# Allegro board SAME70-XPLD.brd
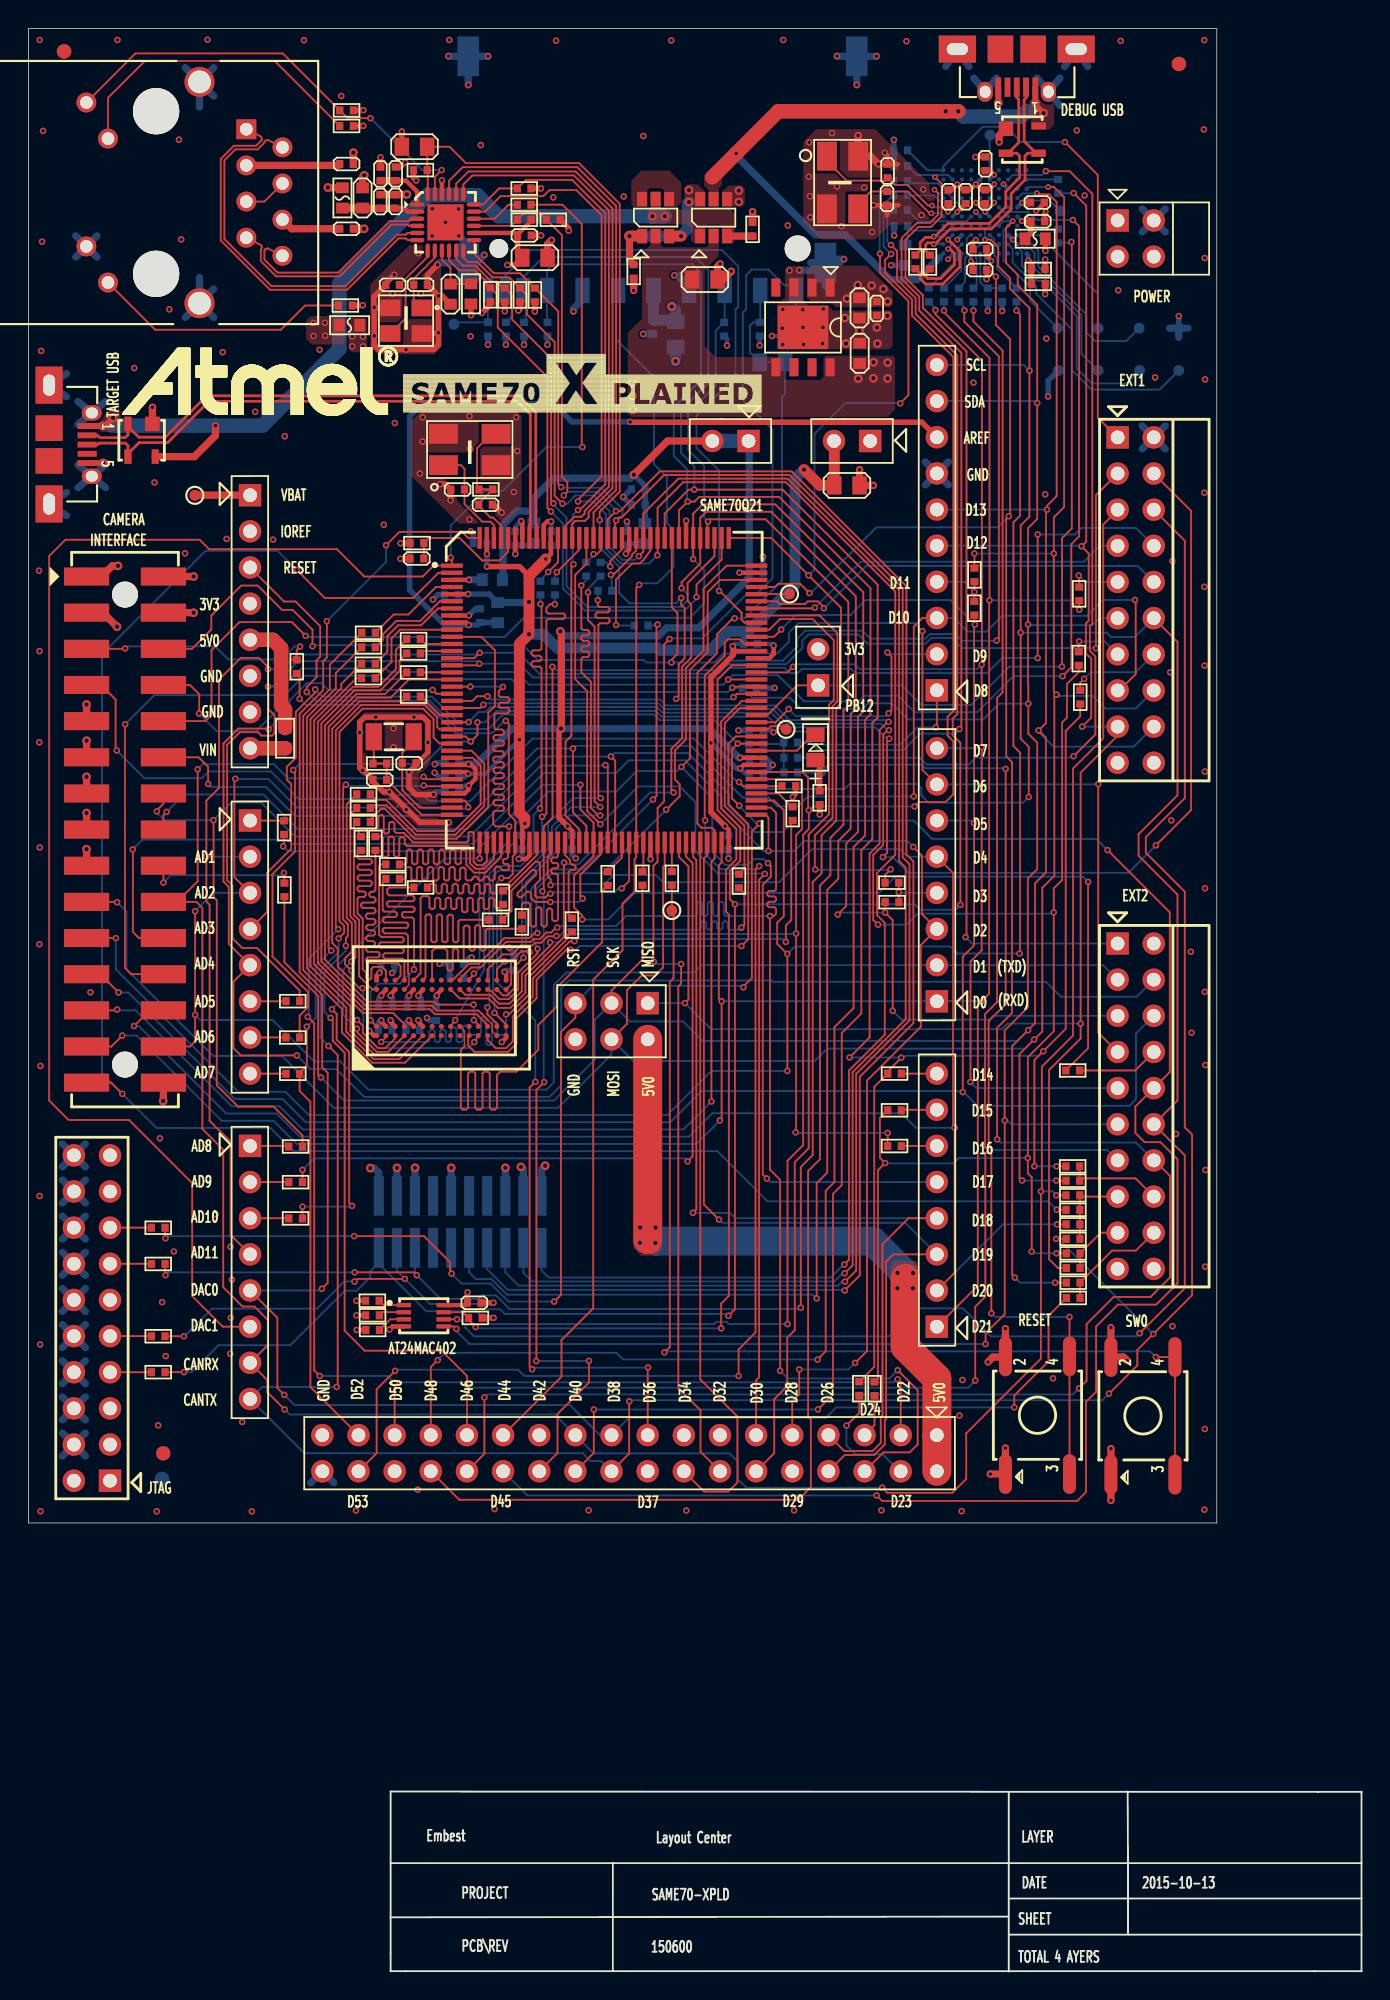
[diagram p0: board, top side]
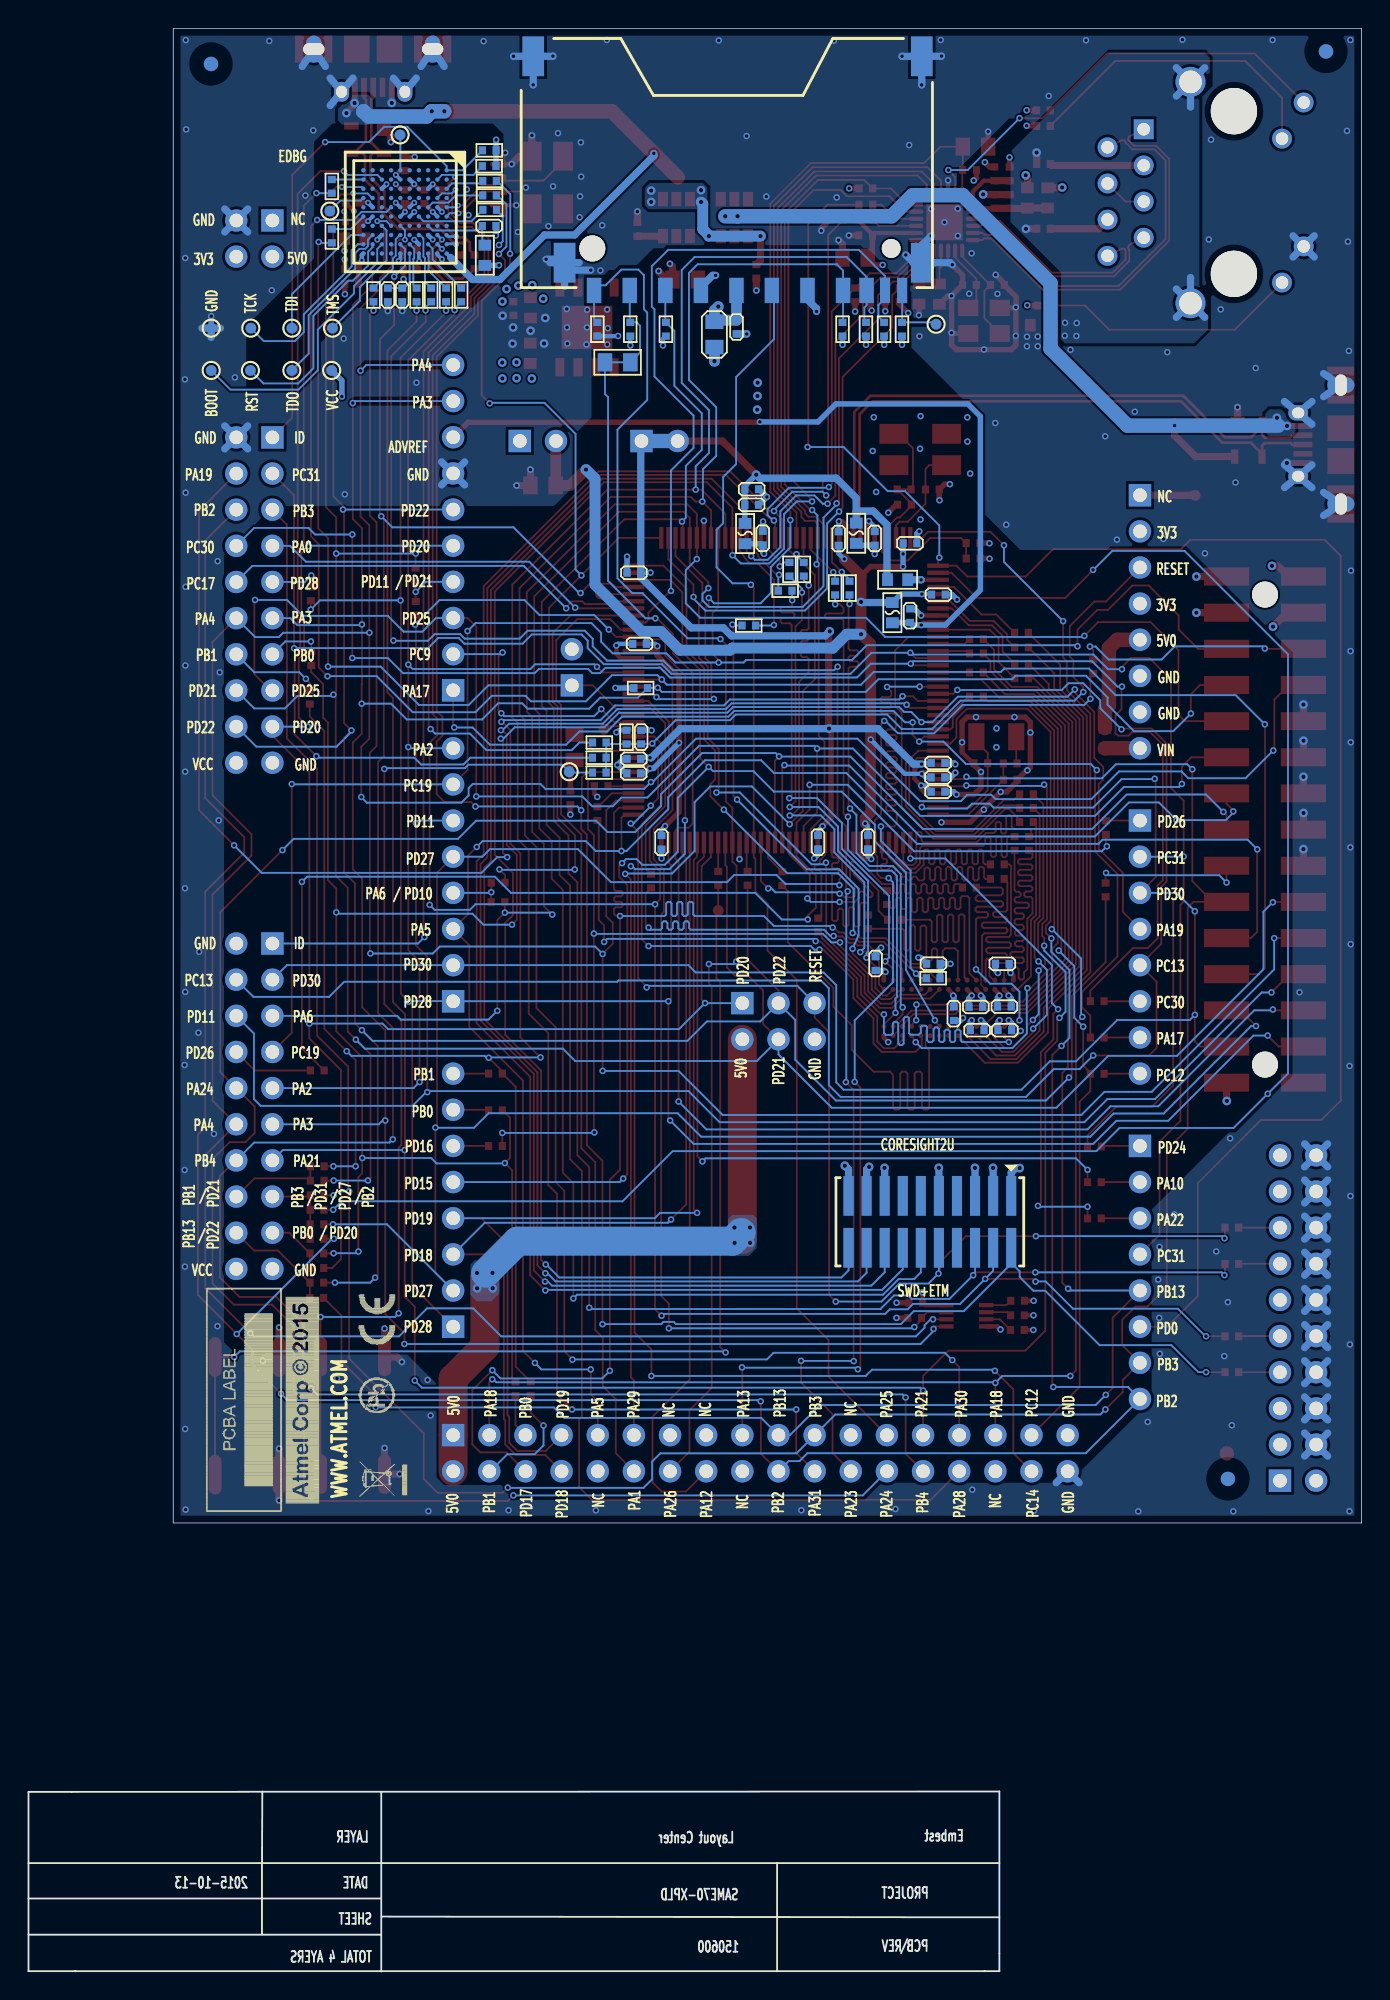
[diagram p1: board, bottom side, seen from below]

Outline 93.67 x 136.52 mm; copper layers: TOP, LYR2_GND, LYR3_VCC, BOTTOM. Coordinates in mm from the lower left corner of the outline.
Outline path: 25.45,7.62 93.67,7.62 ; 25.45,3.81 68.83,3.86 ; 26.51,0.03 25.45,0.03 25.45,1.27 25.45,12.65 90.62,12.62 93.67,12.62 93.67,0.03 90.34,0.03 ; 41.07,7.62 41.07,0.03 ; 68.88,12.62 68.88,0 ; 68.9,5.13 93.67,5.13 ; 68.9,2.59 93.67,2.59 ; 77.24,12.65 77.26,7.62 77.26,2.62 ; 90.39,0.03 26.49,0.03 ; 0,136.52 83.5,136.52 83.5,31.52 0,31.52 0,136.52

## Design rules (mm)
net group CLK: nets PA25 PD0
net group DIFFPAIR0: nets N24853098 N24853544
net group DIFFPAIR1: nets N24853102 N24853479
net group DIFFPAIR2: nets N24780370 N24789501
net group DIFFPAIR4: nets N24828258 N24828281
net group PA15: nets N25013420 PA15
net group PA16: nets N25013426 PA16
net group PA20: nets N25012935 PA20
net group PC0: nets N25013332 PC0
net group PC1: nets N25013338 PC1
net group PC2: nets N25013344 PC2
net group PC3: nets N25013354 PC3
net group PC4: nets N25013360 PC4
net group PC5: nets N25013366 PC5
net group PC6: nets N25013372 PC6
net group PC7: nets N25013378 PC7
net group PC20: nets N25012998 PC20
net group PC21: nets N25012992 PC21
net group PC22: nets N25012989 PC22
net group PC23: nets N25012980 PC23
net group PC24: nets N25012977 PC24
net group PC25: nets N25012968 PC25
net group PC26: nets N25012965 PC26
net group PC27: nets N25012956 PC27
net group PC28: nets N25012953 PC28
net group PC29: nets N25012944 PC29
net group PD13: nets N25012941 PD13
net group PD23: nets N2491361728 PD23
net group PE0: nets N25013384 PE0
net group PE1: nets N25013390 PE1
net group PE2: nets N25013396 PE2
net group PE3: nets N25013402 PE3
net group PE4: nets N25013408 PE4
net group PE5: nets N25013414 PE5
net group USB: nets N24828217 N24828220
net group CAM: nets N24807577 N24807666 PA3 PA4 PA5 PA6 PA9 PA24 PA27 PB3 PC19 PD11 PD12 PD21 PD24 PD25 PD27 PD28 PD30 PD31
net group RMII: nets PD6
net group SDCARD: nets N24863909 PA26 PA28 PA30 PA31 PC16

## Placement (name value [footprint] x y rotation side)
C92  100PF  [C0603]  29.66 117.85 270 top
C104  10nF  [C0402]  50.62 86.73 90 bottom
C200  100nF  [C0402]  36.74 100.68 90 bottom
C201  100nF  [C0402]  31.73 100.35 180 bottom
C202  100nF  [C0402]  29.73 96.74 180 bottom
C203  100nF  [C0402]  51.14 84.19 0 bottom
C204  100nF  [C0402]  50.73 93.28 0 bottom
C205  100nF  [C0402]  29.77 83.9 180 bottom
C206  100nF  [C0402]  34.68 79.35 270 bottom
C207  100nF  [C0402]  49.19 79.34 270 bottom
C208  100nF  [C0402]  42.85 104.15 180 bottom
C209  100nF  [C0402]  29.76 84.91 180 bottom
C210  100nF  [C0402]  29.76 82.89 180 bottom
C211  100nF  [C0402]  51.13 98.28 0 bottom
C212  100nF  [C0402]  51.14 85.2 0 bottom
C213  100nF  [C0402]  38.2 79.34 270 bottom
C214  100nF  [C0402]  42.07 100.71 90 bottom
C215  1uf  [C0402]  42.86 103.05 180 bottom
C216  10uF  [C0805]  57.51 104.41 0 top
C217  100nF  [C0402]  34.21 100.69 90 bottom
C218  100nF  [C0402]  31.72 95.26 270 bottom
C219  10pF  [C0402]  27.29 99.28 180 top
C220  10uF  [C0805]  35.59 120.41 0 top
C300  18pF  [C0402]  24.68 83.73 0 top
C301  18pF  [C0402]  26.75 84.89 180 top
C302  12pF  [C0402]  32.12 103.06 180 top
C303  12pF  [C0402]  30.16 104.12 180 top
C600  100nF  [C0402]  31.33 46.99 0 top
C601  100nF  [C0402]  59.61 116.85 270 top
C602  4.7uf  [C0603]  58.39 116.89 270 top
C603  2.2UF  [C0603]  58.41 113.7 90 top
C612  10uF  [C0805]  45.47 115.02 270 bottom
C613  100nF  [C0402]  43.92 115.54 270 bottom
C700  100nF  [C0402]  25.78 124.36 90 top
C701  4.7uf  [C0603]  23.48 124.61 90 top
C702  100nF  [C0402]  24.72 124.36 90 top
C704  24PF  [C0402]  27.55 118.51 0 top
C705  100nF  [C0402]  22.35 127 0 top
C706  100nF  [C0402]  22.35 122.45 0 top
C708  2.2uf  [C0402]  24.73 126.3 90 top
C709  24PF  [C0402]  25.59 118.5 180 top
C710  100nF  [C0402]  25.8 126.31 90 top
C711  100nF  [C0402]  34.85 121.98 0 top
C713  10uF  [C0805]  27.13 128.21 180 top
C714  10uF  [C0805]  47.53 118.88 0 top
C900  22pF  [C0402]  60.37 126.5 90 top
C901  22pF  [C0402]  60.33 124.58 270 top
C902  10pF  [C0402]  61.3 122.64 180 bottom
C904  100nF  [C0402]  70.92 122.97 0 top
C905  2.2uf  [C0402]  68.41 117.8 270 bottom
C906  1nF  [C0402]  67.41 117.8 270 bottom
C908  2.2uf  [C0402]  25.1 67.8 0 bottom
C909  2.2uf  [C0402]  66.84 119.55 0 top
C910  100nF  [C0402]  66.84 121.02 0 top
C911  100nF  [C0402]  67.23 127.01 90 top
C912  100nF  [C0402]  67.23 124.7 90 top
C913  100nF  [C0402]  64.64 124.7 90 top
C914  2.2uf  [C0402]  70.89 124.29 0 top
C915  2.2uf  [C0402]  65.85 124.7 90 top
C916  100nF  [C0402]  34.15 70.82 90 bottom
C917  100nF  [C0402]  30.08 70.81 0 bottom
C918  100nF  [C0402]  25.24 70.8 0 bottom
C919  100nF  [C0402]  28.65 67.3 270 bottom
C920  100nF  [C0402]  25.07 66.14 180 bottom
C921  100nF  [C0402]  27.1 67.77 0 bottom
C922  100nF  [C0402]  27.01 66.14 180 bottom
D301  Green  [LED0805]  55.3 86.01 90 top
D302  PRTR5V0U2X  [SOT143B]  7.95 107.59 180 top
D902  PRTR5V0U2X  [SOT143B]  69.83 128.71 270 top
J101  Hearder 2x2  [H2X2LMZ]  77.8 121.76 270 top
J200  HEADER2-100  [H2M]  55.49 91.63 90 top
J201  HEADER2-100  [H2M_SHORT]  49.33 107.53 180 top
J203  HEADER2-100  [H2M]  57.87 107.53 180 top
J300  PAD  [R0402_SHORT]  24.69 84.88 180 top
J301  PAD  [R0402_SHORT]  32.14 104.13 180 top
J302  MICRO USB AB 5  [USBMICRO5_6A_A]  1.45 107.28 270 top
J400  CONN_HDR_15X2  [HS2X15_2MZ]  6.78 80.23 270 top
J401  SKT_2x10  [H2X10LMZ]  77.8 96.36 270 top
J402  SKT_2x10  [H2X10LMZ]  77.8 60.8 270 top
J403  CONN_HDR_10X2_19  [HS2X10JZ]  30.33 52.67 0 bottom
J406  SKT_2x10  [H2X10MZ]  4.46 45.91 90 top
J500  CONN_HDR_10X1  [H10M]  63.83 101.45 90 top
J501  CONN_HDR_8X1  [H8M]  15.57 94.84 270 top
J502  CONN_HDR_8X1  [H8M]  15.57 71.98 270 top
J503  CONN_HDR_8X1  [H8M]  63.83 77.06 90 top
J504  CONN_HDR_8X1  [H8M]  15.57 49.12 270 top
J505  CONN_HDR_8X1  [H8M]  63.83 54.2 90 top
J506  CONN_HDR_3X2  [H2X3MZ]  40.97 66.77 180 top
J507  CONN_HDR_18X2  [H2X18MZ]  42.24 36.42 180 top
J600  SD Card SOCKET  [SD11_6B280X180]  44.55 118.11 0 bottom
J700  RJ45  [RJ45_RB1-125B_P12_4]  15.31 129.44 90 top
J900  MICRO USB AB 5  [USBMICRO5_6A_A]  69.45 135.07 180 top
J901  PAD  [R0805_SHORT]  52.27 113.06 0 bottom
L200  470ohm@100MHz  [F0603]  32.97 95.47 270 bottom
L201  470ohm@100MHz  [F0603]  43.32 101.03 270 bottom
L202  470ohm@100MHz  [F0603]  35.51 101.06 270 bottom
L700  470ohm@100MHz  [F0603]  22.06 124.61 90 top
L701  470ohm@100MHz  [F0603]  22.57 115.67 0 top
L901  470ohm@100MHz  [F0603]  70.74 121.75 0 top
NOREF  -  []  8.26 9.36 0 top
NOREF#2  -  []  49.83 53.51 0 top
NOREF#3  -  []  96.26 9.36 90 top
NOREF#4  v*  [unnamed#2]  80.83 134.02 0 top
NOREF#5  v*  [unnamed#2]  9.47 36.41 0 top
NOREF#6  v*  [unnamed#2]  2.5 134.91 0 top
NOREF#7  v*  [unnamed#2]  80.85 134.02 180 bottom
NOREF#8  v*  [unnamed#2]  9.39 34.61 180 bottom
NOREF#9  v*  [unnamed#2]  2.5 134.9 180 bottom
Q109  FDC6312P  [SOT23_6TR_A]  44.07 123.23 90 top
Q110  FDC6312P  [SOT23_6TR_A]  48.14 123.23 90 top
R55  1.5K  [R0402]  33.47 117.8 90 top
R56  1.5K  [R0402]  32.45 117.8 90 top
R67  10K  [R0402]  34.53 117.8 270 top
R69  10K  [R0402]  35.58 117.8 270 top
R70  10K  [R0402]  36.88 123.08 0 top
R71  10K  [R0402]  34.84 123.08 180 top
R106  100K  [R0402]  51.65 86.73 270 bottom
R107  330R  [R0402]  53.56 86.35 0 bottom
R110  39R  [R0402]  53.56 84.24 180 bottom
R111  22R  [R0402]  43.06 94.57 180 bottom
R112  22R  [R0402]  40.5 97.02 0 bottom
R113  22R  [R0402]  40.2 98.52 90 bottom
R114  22R  [R0402]  39.19 98.52 90 bottom
R115  22R  [R0402]  36.99 97.2 90 bottom
R116  22R  [R0402]  35.98 97.2 90 bottom
R117  22R  [R0402]  27.06 92.61 0 top
R118  22R  [R0402]  27.06 93.62 0 top
R119  22R  [R0402]  53.7 81.35 90 top
R120  22R  [R0402]  27.06 91.27 0 top
R121  22R  [R0402]  49.92 76.62 90 top
R122  0R  [R0402]  53.56 85.28 180 bottom
R123  22R  [R0402]  27.06 89.57 0 top
R124  22R  [R0402]  40.7 76.78 90 top
R125  22R  [R0402]  23.55 80.76 180 top
R126  22R  [R0402]  23.36 79.26 270 top
R127  22R  [R0402]  24.38 79.26 270 top
R128  22R  [R0402]  25.59 77.79 180 top
R129  22R  [R0402]  25.59 76.77 180 top
R130  22R  [R0402]  33.34 75.45 270 top
R131  22R  [R0402]  32.82 73.9 180 top
R132  22R  [R0402]  34.67 73.74 270 top
R133  22R  [R0402]  23.9 94.06 180 top
R134  22R  [R0402]  23.89 93.04 180 top
R135  22R  [R0402]  23.89 91.89 180 top
R136  22R  [R0402]  23.89 90.87 180 top
R137  22R  [R0402]  23.54 81.75 180 top
R138  22R  [R0402]  23.54 82.72 180 top
R139  22R  [R0402]  38.18 73.53 270 top
R140  22R  [R0402]  27.56 76.16 180 top
R201  0R  [R0402]  73.8 92.24 90 top
R202  0R  [R0402]  73.9 89.54 270 top
R203  0R  [R0402]  73.83 96.79 90 top
R204  0R  [R0402]  73.39 52.5 0 top
R205  0R  [R0402]  73.41 49.43 0 top
R206  39R  [R0402]  43.14 76.81 90 top
R207  0R  [R0402]  60.86 63.09 180 top
R208  0R  [R0402]  60.86 60.51 180 top
R209  0R  [R0402]  73.38 63.31 180 top
R210  0R  [R0402]  66.47 98.13 90 top
R211  0R  [R0402]  58.38 40.95 270 top
R212  0R  [R0402]  66.46 95.78 270 top
R213  0R  [R0402]  59.45 40.95 90 top
R214  0R  [R0402]  18.57 68.18 180 top
R215  0R  [R0402]  17.96 80.37 90 top
R216  0R  [R0402]  18.57 65.62 180 top
R217  0R  [R0402]  60.68 75.13 180 top
R218  0R  [R0402]  60.67 76.5 180 top
R219  0R  [R0402]  18.77 57.97 180 top
R220  0R  [R0402]  18.77 55.46 180 top
R221  0R  [R0402]  18.77 52.91 180 top
R222  0R  [R0402]  18.85 91.68 90 top
R223  0R  [R0402]  17.98 76 270 top
R224  0R  [R0402]  73.39 54.54 0 top
R225  0R  [R0402]  73.39 53.52 0 top
R226  0R  [R0402]  73.4 51.48 0 top
R227  0R  [R0402]  73.41 50.46 0 top
R228  0R  [R0402]  73.38 56.57 180 top
R229  0R  [R0402]  73.41 47.33 180 top
R230  0R  [R0402]  73.41 48.4 180 top
R231  4.7K  [R0402]  50.65 90.18 0 bottom
R232  4.7K  [R0402]  53.43 83.29 0 top
R233  5.62K  [R0402]  27.3 100.36 180 top
R234  0R  [R0402]  60.86 58 180 top
R235  0R  [R0402]  73.38 55.56 180 top
R236  0R  [R0402]  18.57 63.08 180 top
R238  39R  [R0402]  34.83 124.14 0 top
R300  39R  [R0402]  45.21 76.81 90 top
R303  330R  [R0402]  55.59 82.47 270 top
R400  0R  [R0402]  9.12 42.11 0 top
R401  0R  [R0402]  9.12 44.63 0 top
R402  0R  [R0402]  9.12 52.26 0 top
R403  0R  [R0402]  9.12 49.72 0 top
R600  10K  [R0402]  24.19 45.08 180 top
R601  10K  [R0402]  24.18 46.1 180 top
R602  10K  [R0402]  24.17 47.13 180 top
R603  10K  [R0402]  31.4 45.93 180 top
R604  10K  [R0402]  22.35 130.76 0 top
R606  10K  [R0402]  48.88 115.39 270 bottom
R607  100K  [R0402]  51.38 115.39 90 bottom
R608  100K  [R0402]  53.69 115.39 90 bottom
R609  100K  [R0402]  34.82 115.39 90 bottom
R610  100K  [R0402]  36.47 115.39 90 bottom
R611  10K  [R0402]  33.55 115.39 270 bottom
R612  10K  [R0402]  32.29 115.39 270 bottom
R613  100K  [R0402]  42.53 119.45 270 top
R614  100K  [R0402]  50.88 122.41 90 top
R615  47K  [R0402]  70.96 118.57 0 top
R616  47K  [R0402]  70.95 119.62 180 top
R617  100K  [R0402]  30.1 69.79 0 bottom
R623  0R  [R0603]  18.03 86.65 270 top
R624  0R  [R0603]  32.6 97.79 0 bottom
R701  470  [R0402]  22.35 129.67 180 top
R702  10K  [R0402]  27.54 126.57 0 top
R703  470  [R0402]  22.27 117.05 180 top
R704  6.49K  [R0603]  31.09 117.87 270 top
R900  330R  [R0402]  72.35 121.94 90 bottom
R902  1K  [R0402]  61.29 127.96 0 bottom
R903  1K  [R0402]  61.3 126.84 180 bottom
R904  330R  [R0402]  61.26 123.77 0 bottom
R905  330R  [R0402]  61.27 124.79 0 bottom
R906  1K  [R0402]  34.83 125.28 0 top
R910  330R  [R0402]  66.4 117.8 270 bottom
R911  330R  [R0402]  69.43 117.8 270 bottom
R912  330R  [R0402]  65.37 117.8 270 bottom
R913  330R  [R0402]  64.33 117.8 270 bottom
R914  330R  [R0402]  63.27 117.8 270 bottom
R915  330R  [R0402]  72.35 125.42 90 bottom
R916  39R  [R0402]  63.34 120.11 90 top
R917  39R  [R0402]  62.32 120.12 90 top
R918  6.81K  [R0603]  61.6 120.58 270 bottom
R921  330R  [R0402]  61.27 125.81 0 bottom
SW100  TP-1138  [SWS4B60S_A]  70.9 39.09 90 top
SW300  TP-1138  [SWS4B60S_A]  78.31 39.04 90 top
TP100  TPAD_030  [TP30]  55.68 84.3 180 bottom
TP200  TPAD_030  [TP30]  53.23 87.28 0 top
TP201  TPAD_030  [TP30]  53.48 96.78 0 top
TP300  TPAD_030  [TP30]  45.2 74.55 0 top
TP600  TPAD_030  [TP30]  29.9 115.74 180 bottom
TP900  TPAD_030  [TP30]  80.83 115.46 180 bottom
TP901  TPAD_030  [TP30]  80.83 112.49 180 bottom
TP902  TPAD_030  [TP30]  78.05 115.46 180 bottom
TP903  TPAD_030  [TP30]  75.16 115.46 180 bottom
TP904  TPAD_030  [TP30]  75.16 112.49 180 bottom
TP905  TPAD_030  [TP30]  72.31 115.46 180 bottom
TP906  TPAD_030  [TP30]  78.07 112.49 180 bottom
TP907  TPAD_030  [TP30]  72.36 112.49 180 bottom
TP908  TPAD_030  [TP30]  72.49 123.69 180 bottom
TP909  TPAD_030  [TP30]  67.56 129.04 180 bottom
TP910  TPAD_030  [TP30]  11.69 103.72 0 top
U200  SAME70Q21  [LQPF144P5]  40.46 90.02 0 top
U600  AT24MAC402-MAHM-T  [UDFN8CR]  27.78 46.08 0 top
U601  BD33IC0WEFJ-E2  [SOP8_1JA]  54.42 115.51 180 top
U700  KSZ8081RNACA  [QFN24_1P5M]  29.3 122.9 0 top
U900  AT32UC3A4256J-C1UR  [BGA100F]  67.21 123.63 270 bottom
U901  IS42S16100F-5BL  [BGA60F]  29.01 67.7 90 top
XC300  32.768 kHz  [X2S32X15]  25.66 86.75 180 top
XC301  12MHz  [X4S50X32]  31.01 106.94 0 top
XC700  25MHZ  [X4S32X25]  26.53 115.99 180 top
XC900  12MHz  [X4S50X32]  57.21 125.69 270 top

## Library data of the parts
C92 = CAP_NP: signal model: DEFAULT_CAPACITOR_100.000000pF_2_1
C104 = C_Generic
C200-C214 C216-C218 C220 C600 C601 C612 C613 C700 C702 C705 C706 C710 C711 C713 C714 C904 C910-C913 C916-C922 = C_Generic: tolerance: 10%
C215 C602 C701 C708 C905 C908 C909 C914 C915 = CAP-100nF-0603-25V-X7R: tolerance: 10% X5R
C219 C902 = C_Generic: tolerance: CAP  10UF 10V 10%  SMD0805
C300-C303 C900 C901 = CAP-18pF-0603-50V-COG: tolerance: COG
C603 = CAP_NP: signal model: DEFAULT_CAPACITOR_1e+06pF_2_1
C704 C709 = CAP_NP: signal model: DEFAULT_CAPACITOR_24.000000pF_2_1
C906 = C_Generic: tolerance: 5%
D301 = LED_Small
D302 D902 = PRTR5V0U2X_0
J101 = HDR 7x2_3.100"
J200 J201 J203 = TSW 2PTS-DROIT_1
J300 J301 J901 = PAD
J302 J900 = USB_MINI_AB_RECEPTACLE
J400 = CONN_HDR_15X2
J401 J402 J406 = CONN_HDR_10X2
J403 = CONN_HDR_10X2_19
J500 = CONN_HDR_10X1
J501-J505 = CONN_HDR_8X1
J506 = CONN_HDR_3X2
J507 = CONN_HDR_18X2
J600 = SD Card SOCKET
J700 = CONN_RJ45_8P_SH
L200-L202 L700 L701 L901 = FBEAD_1
Q109 Q110 = FDC6312P
R55 R56 = RES: signal model: DEFAULT_RESISTOR_1500OHM_2_1; room: RMII_PHY
R67 R69-R71 R600-R604 R606 R611 R612 R615 R616 R702 = RES: signal model: DEFAULT_RESISTOR_10000OHM_2_1; room: RMII_PHY
R106 R107 R110 R206 R238 R300 R303 R607-R610 R613 R614 R617 R900 R904 R905 R910-R917 R921 = R_Generic: tolerance: 1%
R111-R121 R123-R140 = R_Generic: tolerance: 1%; signal model: R_GENERIC_R0402_22R_1%_22R
R122 R201-R205 R207-R230 R234-R236 R400-R403 R623 R624 = R_Generic: tolerance: 5%
R231 R232 = RES: signal model: DEFAULT_RESISTOR_10000OHM_2_1
R233 R902 R903 R906 R918 = R_Generic
R701 R703 = RES
R704 = RES: signal model: DEFAULT_RESISTOR_6490OHM_2_1
SW100 SW300 = B3S_2
TP100 TP200 TP201 TP300 TP600 TP900-TP910 = TestLoop
U200 = SAMV71Q21_2
U600 = AT24MAC402-MAHM-T
U601 = BD33IC0WEFJ-E2_0
U700 = KSZ8081RNACA_QFN_24P
U900 = AT32UC3A4256J
U901 = IS42S16100E
XC300 = CM415_0.768kHz: tolerance: 20ppm _-10C.+60C
XC301 XC900 = 12MHz_0
XC700 = CRYSTAL13

## Footprints (pads in the part's own frame, mm; a bottom-side part is the same pattern mirrored in y, then rotated)
BGA60F
  round 0.356 smd: A1(-1.95,4.55) A2(-1.3,4.55) A6(1.3,4.55) A7(1.95,4.55) B1(-1.95,3.9) B2(-1.3,3.9) B6(1.3,3.9) B7(1.95,3.9) C1(-1.95,3.25) C2(-1.3,3.25) C6(1.3,3.25) C7(1.95,3.25) D1(-1.95,2.6) D2(-1.3,2.6) D6(1.3,2.6) D7(1.95,2.6) E1(-1.95,1.95) E2(-1.3,1.95) E6(1.3,1.95) E7(1.95,1.95) F1(-1.95,1.3) F2(-1.3,1.3) F6(1.3,1.3) F7(1.95,1.3) G1(-1.95,0.65) G2(-1.3,0.65) G6(1.3,0.65) G7(1.95,0.65) H1(-1.95,0) H2(-1.3,0) H6(1.3,0) H7(1.95,0) J1(-1.95,-0.65) J2(-1.3,-0.65) J6(1.3,-0.65) J7(1.95,-0.65) K1(-1.95,-1.3) K2(-1.3,-1.3) K6(1.3,-1.3) K7(1.95,-1.3) L1(-1.95,-1.95) L2(-1.3,-1.95) L6(1.3,-1.95) L7(1.95,-1.95) M1(-1.95,-2.6) M2(-1.3,-2.6) M6(1.3,-2.6) M7(1.95,-2.6) N1(-1.95,-3.25) N2(-1.3,-3.25) N6(1.3,-3.25) N7(1.95,-3.25) P1(-1.95,-3.9) P2(-1.3,-3.9) P6(1.3,-3.9) P7(1.95,-3.9) R1(-1.95,-4.55) R2(-1.3,-4.55) R6(1.3,-4.55) R7(1.95,-4.55)
BGA100F
  round 0.305 smd: A1(-2.925,2.925) A2(-2.275,2.925) A3(-1.625,2.925) A4(-0.975,2.925) A5(-0.325,2.925) A6(0.325,2.925) A7(0.975,2.925) A8(1.625,2.925) A9(2.275,2.925) A10(2.925,2.925) B1(-2.925,2.275) B2(-2.275,2.275) B3(-1.625,2.275) B4(-0.975,2.275) B5(-0.325,2.275) B6(0.325,2.275) B7(0.975,2.275) B8(1.625,2.275) B9(2.275,2.275) B10(2.925,2.275) C1(-2.925,1.625) C2(-2.275,1.625) C3(-1.625,1.625) C4(-0.975,1.625) C5(-0.325,1.625) C6(0.325,1.625) C7(0.975,1.625) C8(1.625,1.625) C9(2.275,1.625) C10(2.925,1.625) D1(-2.925,0.975) D2(-2.275,0.975) D3(-1.625,0.975) D4(-0.975,0.975) D5(-0.325,0.975) D6(0.325,0.975) D7(0.975,0.975) D8(1.625,0.975) D9(2.275,0.975) D10(2.925,0.975) E1(-2.925,0.325) E2(-2.275,0.325) E3(-1.625,0.325) E4(-0.975,0.325) E5(-0.325,0.325) E6(0.325,0.325) E7(0.975,0.325) E8(1.625,0.325) E9(2.275,0.325) E10(2.925,0.325) F1(-2.925,-0.325) F2(-2.275,-0.325) F3(-1.625,-0.325) F4(-0.975,-0.325) F5(-0.325,-0.325) F6(0.325,-0.325) F7(0.975,-0.325) F8(1.625,-0.325) F9(2.275,-0.325) F10(2.925,-0.325) G1(-2.925,-0.975) G2(-2.275,-0.975) G3(-1.625,-0.975) G4(-0.975,-0.975) G5(-0.325,-0.975) G6(0.325,-0.975) G7(0.975,-0.975) G8(1.625,-0.975) G9(2.275,-0.975) G10(2.925,-0.975) H1(-2.925,-1.625) H2(-2.275,-1.625) H3(-1.625,-1.625) H4(-0.975,-1.625) H5(-0.325,-1.625) H6(0.325,-1.625) H7(0.975,-1.625) H8(1.625,-1.625) H9(2.275,-1.625) H10(2.925,-1.625) J1(-2.925,-2.275) J2(-2.275,-2.275) J3(-1.625,-2.275) J4(-0.975,-2.275) J5(-0.325,-2.275) J6(0.325,-2.275) J7(0.975,-2.275) J8(1.625,-2.275) J9(2.275,-2.275) J10(2.925,-2.275) K1(-2.925,-2.925) K2(-2.275,-2.925) K3(-1.625,-2.925) K4(-0.975,-2.925) K5(-0.325,-2.925) K6(0.325,-2.925) K7(0.975,-2.925) K8(1.625,-2.925) K9(2.275,-2.925) K10(2.925,-2.925)
C0402
  rect 0.508x0.559 smd: 1(-0.483,0) 2(0.483,0)
C0603
  rect 0.762x0.889 smd: 1(-0.711,0) 2(0.711,0)
C0805
  rect 1.016x1.27 smd: 1(-0.889,0) 2(0.889,0)
F0603
  rect 0.762x0.889 smd: 1(-0.711,0) 2(0.711,0)
H2M
  rect 1.575x1.575 hole 0.965: 1(-1.27,0)
  round 1.575 hole 0.965: 2(1.27,0)
H2M_SHORT
  rect 1.575x1.575 hole 0.965: 1(-1.27,0)
  round 1.575 hole 0.965: 2(1.27,0)
H2X2LMZ
  rect 1.575x1.575 hole 0.965: 1(-1.27,-1.27)
  round 1.575 hole 0.965: 2(-1.27,1.27) 3(1.27,-1.27) 4(1.27,1.27)
H2X3MZ
  rect 1.575x1.575 hole 0.965: 1(-2.54,-1.27)
  round 1.575 hole 0.965: 2(-2.54,1.27) 3(0,-1.27) 4(0,1.27) 5(2.54,-1.27) 6(2.54,1.27)
H2X10LMZ
  rect 1.575x1.575 hole 0.965: 1(-11.43,-1.27)
  round 1.575 hole 0.965: 2(-11.43,1.27) 3(-8.89,-1.27) 4(-8.89,1.27) 5(-6.35,-1.27) 6(-6.35,1.27) 7(-3.81,-1.27) 8(-3.81,1.27) 9(-1.27,-1.27) 10(-1.27,1.27) 11(1.27,-1.27) 12(1.27,1.27) 13(3.81,-1.27) 14(3.81,1.27) 15(6.35,-1.27) 16(6.35,1.27) 17(8.89,-1.27) 18(8.89,1.27) 19(11.43,-1.27) 20(11.43,1.27)
H2X10MZ
  rect 1.575x1.575 hole 0.965: 1(-11.43,-1.27)
  round 1.575 hole 0.965: 2(-11.43,1.27) 3(-8.89,-1.27) 4(-8.89,1.27) 5(-6.35,-1.27) 6(-6.35,1.27) 7(-3.81,-1.27) 8(-3.81,1.27) 9(-1.27,-1.27) 10(-1.27,1.27) 11(1.27,-1.27) 12(1.27,1.27) 13(3.81,-1.27) 14(3.81,1.27) 15(6.35,-1.27) 16(6.35,1.27) 17(8.89,-1.27) 18(8.89,1.27) 19(11.43,-1.27) 20(11.43,1.27)
H2X18MZ
  rect 1.575x1.575 hole 0.965: 1(-21.59,-1.27)
  round 1.575 hole 0.965: 2(-21.59,1.27) 3(-19.05,-1.27) 4(-19.05,1.27) 5(-16.51,-1.27) 6(-16.51,1.27) 7(-13.97,-1.27) 8(-13.97,1.27) 9(-11.43,-1.27) 10(-11.43,1.27) 11(-8.89,-1.27) 12(-8.89,1.27) 13(-6.35,-1.27) 14(-6.35,1.27) 15(-3.81,-1.27) 16(-3.81,1.27) 17(-1.27,-1.27) 18(-1.27,1.27) 19(1.27,-1.27) 20(1.27,1.27) 21(3.81,-1.27) 22(3.81,1.27) 23(6.35,-1.27) 24(6.35,1.27) 25(8.89,-1.27) 26(8.89,1.27) 27(11.43,-1.27) 28(11.43,1.27) 29(13.97,-1.27) 30(13.97,1.27) 31(16.51,-1.27) 32(16.51,1.27) 33(19.05,-1.27) 34(19.05,1.27) 35(21.59,-1.27) 36(21.59,1.27)
H8M
  rect 1.575x1.575 hole 0.965: 1(-8.89,0)
  round 1.575 hole 0.965: 2(-6.35,0) 3(-3.81,0) 4(-1.27,0) 5(1.27,0) 6(3.81,0) 7(6.35,0) 8(8.89,0)
H10M
  rect 1.575x1.575 hole 0.965: 1(-11.43,0)
  round 1.575 hole 0.965: 2(-8.89,0) 3(-6.35,0) 4(-3.81,0) 5(-1.27,0) 6(1.27,0) 7(3.81,0) 8(6.35,0) 9(8.89,0) 10(11.43,0)
HS2X10JZ
  rect 0.711x2.794 smd: (-1.905,-1.825) 1(-5.715,-1.825) 2(-5.715,1.825) 3(-4.445,-1.825) 4(-4.445,1.825) 5(-3.175,-1.825) 6(-3.175,1.825) 8(-1.905,1.825) 9(-0.635,-1.825) 10(-0.635,1.825) 11(0.635,-1.825) 12(0.635,1.825) 13(1.905,-1.825) 14(1.905,1.825) 15(3.175,-1.825) 16(3.175,1.825) 17(4.445,-1.825) 18(4.445,1.825) 19(5.715,-1.825) 20(5.715,1.825)
HS2X15_2MZ
  round 1.829 hole 1.829 unplated: (-16.51,0) (16.51,0)
  rect 1.27x3.175 smd: 1(-17.78,-2.7) 2(-17.78,2.7) 3(-15.24,-2.7) 4(-15.24,2.7) 5(-12.7,-2.7) 6(-12.7,2.7) 7(-10.16,-2.7) 8(-10.16,2.7) 9(-7.62,-2.7) 10(-7.62,2.7) 11(-5.08,-2.7) 12(-5.08,2.7) 13(-2.54,-2.7) 14(-2.54,2.7) 15(0,-2.7) 16(0,2.7) 17(2.54,-2.7) 18(2.54,2.7) 19(5.08,-2.7) 20(5.08,2.7) 21(7.62,-2.7) 22(7.62,2.7) 23(10.16,-2.7) 24(10.16,2.7) 25(12.7,-2.7) 26(12.7,2.7) 27(15.24,-2.7) 28(15.24,2.7) 29(17.78,-2.7) 30(17.78,2.7)
LED0805
  rect 1.016x1.27 smd: 1(-0.889,0) 2(0.889,0)
LQPF144P5
  rect 1.524x0.305 smd: 1(-10.7,8.75) 2(-10.7,8.25) 3(-10.7,7.75) 4(-10.7,7.25) 5(-10.7,6.75) 6(-10.7,6.25) 7(-10.7,5.75) 8(-10.7,5.25) 9(-10.7,4.75) 10(-10.7,4.25) 11(-10.7,3.75) 12(-10.7,3.25) 13(-10.7,2.75) 14(-10.7,2.25) 15(-10.7,1.75) 16(-10.7,1.25) 17(-10.7,0.75) 18(-10.7,0.25) 19(-10.7,-0.25) 20(-10.7,-0.75) 21(-10.7,-1.25) 22(-10.7,-1.75) 23(-10.7,-2.25) 24(-10.7,-2.75) 25(-10.7,-3.25) 26(-10.7,-3.75) 27(-10.7,-4.25) 28(-10.7,-4.75) 29(-10.7,-5.25) 30(-10.7,-5.75) 31(-10.7,-6.25) 32(-10.7,-6.75) 33(-10.7,-7.25) 34(-10.7,-7.75) 35(-10.7,-8.25) 36(-10.7,-8.75) 73(10.7,-8.75) 74(10.7,-8.25) 75(10.7,-7.75) 76(10.7,-7.25) 77(10.7,-6.75) 78(10.7,-6.25) 79(10.7,-5.75) 80(10.7,-5.25) 81(10.7,-4.75) 82(10.7,-4.25) 83(10.7,-3.75) 84(10.7,-3.25) 85(10.7,-2.75) 86(10.7,-2.25) 87(10.7,-1.75) 88(10.7,-1.25) 89(10.7,-0.75) 90(10.7,-0.25) 91(10.7,0.25) 92(10.7,0.75) 93(10.7,1.25) 94(10.7,1.75) 95(10.7,2.25) 96(10.7,2.75) 97(10.7,3.25) 98(10.7,3.75) 99(10.7,4.25) 100(10.7,4.75) 101(10.7,5.25) 102(10.7,5.75) 103(10.7,6.25) 104(10.7,6.75) 105(10.7,7.25) 106(10.7,7.75) 107(10.7,8.25) 108(10.7,8.75)
  rect 0.305x1.524 smd: 37(-8.75,-10.7) 38(-8.25,-10.7) 39(-7.75,-10.7) 40(-7.25,-10.7) 41(-6.75,-10.7) 42(-6.25,-10.7) 43(-5.75,-10.7) 44(-5.25,-10.7) 45(-4.75,-10.7) 46(-4.25,-10.7) 47(-3.75,-10.7) 48(-3.25,-10.7) 49(-2.75,-10.7) 50(-2.25,-10.7) 51(-1.75,-10.7) 52(-1.25,-10.7) 53(-0.75,-10.7) 54(-0.25,-10.7) 55(0.25,-10.7) 56(0.75,-10.7) 57(1.25,-10.7) 58(1.75,-10.7) 59(2.25,-10.7) 60(2.75,-10.7) 61(3.25,-10.7) 62(3.75,-10.7) 63(4.25,-10.7) 64(4.75,-10.7) 65(5.25,-10.7) 66(5.75,-10.7) 67(6.25,-10.7) 68(6.75,-10.7) 69(7.25,-10.7) 70(7.75,-10.7) 71(8.25,-10.7) 72(8.75,-10.7) 109(8.75,10.7) 110(8.25,10.7) 111(7.75,10.7) 112(7.25,10.7) 113(6.75,10.7) 114(6.25,10.7) 115(5.75,10.7) 116(5.25,10.7) 117(4.75,10.7) 118(4.25,10.7) 119(3.75,10.7) 120(3.25,10.7) 121(2.75,10.7) 122(2.25,10.7) 123(1.75,10.7) 124(1.25,10.7) 125(0.75,10.7) 126(0.25,10.7) 127(-0.25,10.7) 128(-0.75,10.7) 129(-1.25,10.7) 130(-1.75,10.7) 131(-2.25,10.7) 132(-2.75,10.7) 133(-3.25,10.7) 134(-3.75,10.7) 135(-4.25,10.7) 136(-4.75,10.7) 137(-5.25,10.7) 138(-5.75,10.7) 139(-6.25,10.7) 140(-6.75,10.7) 141(-7.25,10.7) 142(-7.75,10.7) 143(-8.25,10.7) 144(-8.75,10.7)
QFN24_1P5M
  oval 1.016x0.305 smd: 1(-2,1.25) 2(-2,0.75) 3(-2,0.25) 4(-2,-0.25) 5(-2,-0.75) 6(-2,-1.25) 13(2,-1.25) 14(2,-0.75) 15(2,-0.25) 16(2,0.25) 17(2,0.75) 18(2,1.25)
  oval 0.305x1.016 smd: 7(-1.25,-2) 8(-0.75,-2) 9(-0.25,-2) 10(0.25,-2) 11(0.75,-2) 12(1.25,-2) 19(1.25,2) 20(0.75,2) 21(0.25,2) 22(-0.25,2) 23(-0.75,2) 24(-1.25,2)
  rect 2.54x2.54 smd: 25(0,0)
R0402
  rect 0.508x0.559 smd: 1(-0.483,0) 2(0.483,0)
R0402_SHORT
  rect 0.508x0.559 smd: 1(-0.483,0) 2(0.483,0)
R0603
  rect 0.762x0.889 smd: 1(-0.711,0) 2(0.711,0)
R0805_SHORT
  rect 1.016x1.27 smd: 1(-0.889,0) 2(0.889,0)
RJ45_RB1-125B_P12_4
  round 3.251 hole 3.251 unplated: (-10.16,6.34) (1.27,6.34)
  rect 1.397x1.397 hole 0.889: 1(0,0)
  round 1.397 hole 0.889: 2(-1.27,-2.54) 3(-2.54,0) 4(-3.81,-2.54) 5(-5.08,0) 6(-6.35,-2.54) 7(-7.62,0) 8(-8.89,-2.54) 11(-10.77,9.72) 12(-8.23,11.24) 13(-0.66,9.72) 14(1.88,11.24)
  round 2.108 hole 1.6: 9(-12.22,3.29) 10(3.33,3.29)
SD11_6B280X180
  round 1.321 hole 1.321 unplated: (-11.5,-2.95)
  round 1.829 hole 1.829 unplated: (9.5,-2.95)
  rect 1.016x1.778 smd: 1(6.87,0) 2(4.37,0) 3(1.87,0) 4(-0.63,0) 5(-3.12,0) 6(-5.62,0) 7(-8.12,0) 8(-9.77,0) 9(9.38,0)
  rect 0.711x1.778 smd: 10(-11.07,0) 11(-12.27,0)
  rect 1.524x2.794 smd: 12(-13.65,-1.95) 13(11.45,-1.95) 14(-13.65,-16.45) 15(13.65,-16.45)
SOP8_1JA
  rect 0.635x1.27 smd: 1(-1.905,-2.8) 2(-0.635,-2.8) 3(0.635,-2.8) 4(1.905,-2.8) 5(1.905,2.8) 6(0.635,2.8) 7(-0.635,2.8) 8(-1.905,2.8)
  rect 3.556x3.048 smd: 9(0,0)
SOT23_6TR_A
  rect 1.016x0.711 smd: 1(-1.3,0.95) 2(-1.3,0) 3(-1.3,-0.95) 4(1.3,-0.95) 5(1.3,0) 6(1.3,0.95)
SOT143B
  rect 1.016x1.016 smd: 1(-0.76,-1.15)
  rect 0.508x1.016 smd: 2(0.96,-1.15) 3(0.96,1.15) 4(-0.96,1.15)
SWS4B60S_A
  oval 2.794x0.914 smd: 1(-4.131,2.25) 2(4.131,2.25) 3(-4.131,-2.25) 4(4.131,-2.25)
TP30
  round 0.762 smd: 1(0,0)
UDFN8CR
  rect 1.016x0.305 smd: 1(-1.4,0.75) 2(-1.4,0.25) 3(-1.4,-0.25) 4(-1.4,-0.75) 5(1.4,-0.75) 6(1.4,-0.25) 7(1.4,0.25) 8(1.4,0.75)
unnamed#2
  round 1.016 smd: 1(0,0)
USBMICRO5_6A_A
  rect 1.803x1.905 smd: (-1.15,0) (1.15,0)
  rect 0.406x1.346 smd: 1(-1.3,2.675) 2(-0.65,2.675) 3(0,2.675) 4(0.65,2.675) 5(1.3,2.675)
  oval 1.067x1.397 hole 0.762x0.864: S1(-2.225,3) S2(2.225,3)
  rect 2.616x1.905 hole 1.499x0.838: S3(-4.175,0) S4(4.175,0)
X2S32X15
  rect 1.143x1.905 smd: 1(-1.4,0) 2(1.4,0)
X4S32X25
  rect 1.422x1.168 smd: 1(-1.1,-0.9) 2(1.1,-0.9) 3(1.1,0.9) 4(-1.1,0.9)
X4S50X32
  rect 2.032x1.397 smd: 1(-1.85,-1.1) 2(1.85,-1.1) 3(1.85,1.1) 4(-1.85,1.1)

## Nets
GND_POWER: C92.2 C104.2 C200.2 C201.2 C202.2 C203.2 C204.2 C205.2 C206.2 C207.2 C208.2 C209.2 C210.2 C211.2 C212.2 C213.2 C214.2 C215.2(E2) C216.2 C217.2 C218.1 C219.2 C220.2 C300.1(E1) C301.1(E1) C302.1(E1) C303.2(E2) C600.2 C601.2 C602.2(E2) C603.2 C612.2 C613.2 C700.2 C701.2(E2) C702.2 C704.2 C708.2(E2) C709.2 C710.2 C711.2 C713.2 C714.2 C900.2(E2) C901.2(E2) C902.2 C904.2 C905.2(E2) C906.2 C908.2(E2) C909.2(E2) C910.2 C911.2 C912.2 C913.2 C914.2(E2) C915.2(E2) C916.2 C917.2 C918.2 C919.2 C920.2 C921.2 C922.2 D302.1 D902.1 J101.2(1) J302.5(P5) J302.S1(SHLD1) J302.S2(SHLD2) J302.S3(SHLD3) J302.S4(SHLD4) J400.2 J400.4 J400.9 J400.11 J400.13 J400.15 J400.17 J400.30 J401.2 J401.19 J402.2 J402.19 J403.3 J403.5 J403.9 J403.15 J403.17 J403.19 J406.4 J406.6 J406.8 J406.10 J406.12 J406.14 J406.16 J406.18 J406.20 J500.7 J501.6 J501.7 J506.6(B3) J507.35 J507.36 J600.3(VSS1) J600.6(VSS2) J600.12(SHELL#12) J600.13(SHELL#13) J600.14(SHELL#14) J600.15(SHELL#15) J700.12(L2) J900.5(P5) J900.S1(SHLD1) J900.S2(SHLD2) J900.S3(SHLD3) J900.S4(SHLD4) L701.2 R67.2 R69.2 R70.2 R233.2 R603.1 R613.2 R614.2 R616.1 R704.2 R918.2 SW100.1(T1) SW100.2(T2) SW300.1(T1) SW300.2(T2) TP900.1(PIN1) U200.8(ADVREFN) U200.44(GND_1) U200.61(GND_3) U200.95(GND_2) U200.115(GND_4) U200.135(GND_6) U200.138(GND_5) U600.4(GND) U601.3(GND) U601.9(FIN) U700.22(GND1) U700.25(GND2) U900.B10(GNDPLL) U900.C3(GNDIO_3) U900.C8(GNDIO_5) U900.E2(GNDIO_4) U900.E6(GNDIO_6) U900.F5(GNDIO_1) U900.F10(GNDCORE) U900.H3(GNDIO_2) U900.H8(GNDANA) U901.A1(VSS1) U901.B2(VSSQ1) U901.C6(VSSQ2) U901.E2(VSSQ3) U901.F6(VSSQ4) U901.R1(VSS2) XC301.2 XC301.4 XC700.2 XC700.4 XC900.2 XC900.4
GND_SIGNAL: C705.2 C706.2 J700.9(S1) J700.10(S2) L701.1
VCC_3V3: C220.1 C600.1 C601.1 C602.1(E1) C612.1 C613.1 C711.1 C908.1(E1) C909.1(E1) C910.1 C911.1 C912.1 C913.1 C914.1(E1) C915.1(E1) C916.1 C917.1 C918.1 C919.1 C920.1 C921.1 C922.1 J101.4(2) J200.2(E2) J203.1(E1) J400.1 J400.3 J401.20 J402.20 J403.1 J406.1 J406.2 J501.2 J501.4 J600.4(VDD) L700.2 L901.2 R55.1 R56.1 R71.1 R106.1 R231.2 R232.2 R303.2 R600.2 R601.2 R602.2 R604.2 R606.2 R607.1 R608.1 R609.1 R610.1 R611.2 R612.2 R615.2 R617.1 R701.1 R702.1 R703.1 R902.1 R903.2 R906.2 TP907.1(PIN1) U600.8(VCC) U601.1(VO) U601.2(VO_S) U700.14(VDDIO) U900.B5(VDDIO_5) U900.B6(VDDIO_3) U900.D9(VDDIN_2) U900.D10(VDDIN_1) U900.E5(VDDIO_6) U900.F2(VDDIO_2) U900.F6(VDDIO_1) U900.J5(VDDIO_4) U901.A7(VDD1) U901.B6(VDDQ1) U901.C2(VDDQ2) U901.E6(VDDQ3) U901.F2(VDDQ4) U901.H6(VDD3) U901.R7(VDD2)
VCC_5V0: C603.1 C714.1 J101.3(7) J501.5 J506.2(B1) J507.1 J507.2 Q109.2(S2) Q110.2(S2) R623.1 U601.5(EN) U601.8(VCC)
VCC_MCU_P3V3: C200.1 C201.1 C202.1 C203.1 C204.1 C205.1 C206.1 C207.1 C216.1 J203.2(E2) L200.1 U200.5(VDDIN) U200.30(VDDIO_1) U200.43(VDDIO_2) U200.72(VDDIO_5) U200.80(VDDIO_3) U200.96(VDDIO_4) U200.134(VDDUTMII) U200.143(VDDPLLUSB)
VCC_USB: D302.4 J302.1(P1) Q109.5(S2) Q110.1(G2) Q110.3(G2) R614.1
VCC_USB_EDBG: D902.4 J900.1(P1) Q110.5(S2) U900.A10(USB_VBUS)
VDDA_ENET: C700.1 C701.1(E1) C702.1 L700.1 U700.2(VDDA_3V3)
VDDCORE: C209.1 C210.1 C211.1 C212.1 C213.1 J201.1(E1) U200.29(VDDCORE_1) U200.33(VDDCORE_2) U200.50(VDDCORE_3) U200.81(VDDCORE_5) U200.107(VDDCORE_4)
VDDOUT: C208.1 C215.1(E1) J201.2(E2) L201.1 L202.1 R624.2
VDDPLL_1.2V: C708.1(E1) C710.1 U700.1(VDD_1V2)
ADVREF: C218.2 J500.8 L200.2 U200.9(ADVREFP)
EDBG_ADC0: R615.1 R616.2 U900.K10(PA21/PX22)
EDBG_FORCE_BOOT: TP901.1(PIN1) U900.H9(PA20/PX18)
EDBG_JTAG_TCK: TP902.1(PIN1) U900.K9(TCK)
EDBG_JTAG_TDI: TP903.1(PIN1) U900.K8(TDI)
EDBG_JTAG_TDO: TP904.1(PIN1) U900.J8(TDO)
EDBG_JTAG_TMS: TP905.1(PIN1) U900.H7(TMS)
EDBG_RESET_N: TP906.1(PIN1) U900.J9(RESET_N)
EDBG_TARGET_RESET: R107.2 U900.B4(PA29)
ID_1: J401.1 R902.2 U900.A1(PA28)
ID_2: J402.1 R903.1 U900.B2(PB1)
LED0_SPEED: J700.14(L4) R604.1 U700.23(LED0/ANEN_SPEED)
LED1_LINK: J700.11(L1) R703.2
PA0: J401.7 U200.102(PA0)
PA1: J507.12 U200.99(PA1)
PA2: J402.9 J503.8 R914.2 U200.93(PA2)
PA3: J400.8 J401.11 J402.11 J500.9 R231.1 U200.91(PA3) U600.5(SDA) U900.G7(PA12/PA25)
PA4: J400.7 J401.12 J402.12 J500.10 R232.1 U200.77(PA4) U600.6(SCL) U900.F7(PA26/PB5)
PA5: J400.22 J503.3 J507.9 U200.73(PA5)
PA6: J400.10 J402.5 R217.2 U200.114(PA6)
PA8: C300.2(E2) J300.1 U200.36(PA8)
PA9: J400.21 R911.2 U200.75(PA9)
PA10: R220.1 U200.66(PA10)
PA11: R300.2 U200.64(PA11)
PA12: J507.16 U200.68(PA12)
PA13: J507.17 R222.1 U200.42(PA13)
PA14: R906.1 U200.51(PA14) U700.18(INTRP)
PA15: R139.1 U200.49(PA15)
PA16: R140.1 U200.45(PA16)
PA17: J500.1 R216.1 U200.25(PA17)
PA18: J507.3 J507.31 U200.24(PA18)
PA19: J401.4 J502.4 U200.23(PA19)
PA20: R123.2 U200.22(PA20)
PA21: J402.13 J507.27 R910.2 U200.32(PA21)
PA22: R221.1 U200.37(PA22)
PA23: J507.24 R912.2 U200.46(PA23)
PA24: J400.16 J402.10 J507.26 U200.56(PA24)
PA25: J507.25 J600.5(CLK) U200.59(PA25)
PA26: J507.14 J600.9(DAT2) R608.2 U200.62(PA26)
PA27: J400.25 J901.2 U200.70(PA27)
PA28: J507.30 J600.2(CMD) R606.1 U200.112(PA28)
PA29: J507.11 U200.129(PA29)
PA30: J507.29 J600.7(DAT0) R610.2 U200.116(PA30)
PA31: J507.22 J600.8(DAT1) R609.2 U200.118(PA31)
PB0: R201.1 R208.2 R213.2 R227.1 U200.21(PB0)
PB1: R202.2 R207.2 R211.1 R228.2 U200.20(PB1)
PB2: J401.6 J504.8 J507.20 R226.1 U200.26(PB2)
PB3: J400.20 J401.5 J504.7 J507.21 R224.1 U200.31(PB3)
PB4: J402.14 J507.28 U200.105(PB4) U900.F9(PA3)
PB5: J403.6 R403.2 R921.1 U200.109(PB5)
PB6: J403.2 R400.2 R905.1 U200.79(PB6)
PB7: J403.4 R401.2 R904.1 U200.89(PB7)
PB12: J200.1(E1) R900.1 U200.87(PB12)
PB13: J504.5 J507.19 R229.2 U200.144(PB13)
PC0: R125.1 U200.11(PC0)
PC1: R126.1 U200.38(PC1)
PC2: R127.1 U200.39(PC2)
PC3: R128.1 U200.40(PC3)
PC4: R129.1 U200.41(PC4)
PC5: R130.1 U200.58(PC5)
PC6: R131.1 U200.54(PC6)
PC7: R132.1 U200.48(PC7)
PC8: D301.2(K) U200.82(PC8)
PC9: J500.2 U200.86(PC9)
PC10: C713.1 R702.2 U200.90(PC10) U700.24(R\S\T\)
PC11: R603.2 U200.94(PC11) U600.7(WP)
PC12: J507.33 R236.1 U200.17(PC12)
PC13: J402.4 J502.5 U200.19(PC13)
PC14: J507.34 U200.97(PC14)
PC15: R617.2 U200.18(PC15) U901.L7(CS)
PC16: J600.10(C/D) R611.1 U200.100(PC16)
PC17: J401.10 U200.103(PC17)
PC18: U200.111(PC18) U901.J6(LDQM)
PC19: J400.6 J402.7 J503.7 U200.117(PC19)
PC20: R111.2 U200.120(PC20)
PC21: R112.2 U200.122(PC21)
PC22: R113.2 U200.124(PC22)
PC23: R114.2 U200.127(PC23)
PC24: R115.2 U200.130(PC24)
PC25: R116.2 U200.133(PC25)
PC26: R117.2 U200.13(PC26)
PC27: R118.2 U200.12(PC27)
PC28: R119.2 U200.76(PC28)
PC29: R120.2 U200.16(PC29)
PC30: J401.8 R214.1 U200.15(PC30)
PC31: J401.3 J502.2 J504.4 U200.14(PC31)
PD0: J504.6 R238.2 U200.1(PD0)
PD1: U200.132(PD1) U700.19(TXEN)
PD2: U200.131(PD2) U700.20(TXD0)
PD3: U200.128(PD3) U700.21(TXD1)
PD4: J403.14 R70.1 R71.2 U200.126(PD4) U700.15(CRS_RV/PHYAD1/PHYAD0)
PD5: J403.16 R69.1 U200.125(PD5) U700.13(RXD0)
PD6: J403.18 R67.1 U200.121(PD6) U700.12(RXD1)
PD7: J403.20 U200.119(PD7) U700.17(RXER)
PD8: J403.12 R55.2 U200.113(PD8) U700.11(MDC)
PD9: R56.2 U200.110(PD9) U700.10(MDIO)
PD10: R218.2 U200.101(PD10)
PD11: J400.23 J402.6 J503.6 R212.2 U200.98(PD11)
PD12: J400.24 U200.92(PD12) U900.G5(PX30)
PD13: R121.2 U200.88(PD13)
PD14: U200.84(PD14) U901.L1(CKE)
PD15: J505.5 U200.106(PD15) U901.J2(UDQM)
PD16: R234.2 U200.78(PD16) U901.K6(RAS)
PD17: J507.6 U200.74(PD17) U901.K7(CAS)
PD18: J505.3 J507.8 U200.69(PD18)
PD19: J505.4 J507.7 U200.67(PD19)
PD20: J401.17 J500.5 J506.1(A1) R205.1 R915.1 U200.65(PD20)
PD21: J400.19 J401.16 J506.4(B2) R210.2 R235.2 U200.63(PD21) U900.K3(PX28)
PD22: J401.18 J500.6 J506.3(A2) R206.1 R223.2 R230.2 U900.J4(PX29)
PD23: R124.2 U200.57(PD23)
PD24: J400.14 R219.1 U200.55(PD24)
PD25: J400.12 J401.15 J500.3 U200.52(PD25)
PD26: R209.2 R215.1 U200.53(PD26)
PD27: J400.26 J503.5 J505.2 R204.1 U200.47(PD27)
PD28: J400.27 J503.1 J505.1 R203.1 R913.2 U200.71(PD28)
PD29: U200.108(PD29) U901.J7(WE)
PD30: J400.28 J402.3 J502.3 J503.2 U200.34(PD30)
PD31: J400.29 R225.1 U200.2(PD31)
PE0: R133.1 U200.4(PE0)
PE1: R134.1 U200.6(PE1)
PE2: R135.1 U200.7(PE2)
PE3: R136.1 U200.10(PE3)
PE4: R137.1 U200.27(PE4)
PE5: R138.1 U200.28(PE5)
RMII_XTALI: C704.1 U700.8(XI) XC700.1
RMII_XTALO: C709.1 U700.7(XO) XC700.3
TARGET_RESET: C104.1 J403.10 J501.3 J506.5(A3) R106.2 R107.1 R110.2 R122.2 R402.2 U200.83(NRST)
TARGET_RESET_SENSE: R122.1 U900.H2(PX21)
XIN: C303.1(E1) U200.142(PB9) XC301.1
XIN0: C900.1(E1) U900.A5(PC2) XC900.1
XIN32: C301.2(E2) U200.35(PA7) XC300.1(S1)
XOUT: J301.2 XC301.3
XOUT0: C901.1(E1) U900.A6(PC3) XC900.3
XOUT32: J300.2 XC300.2(S2)
N24777744: R624.1 U200.3(VDDOUT)
N24777943: C217.1 L202.2 U200.139(VDDUTMIC)
N24777956: C214.1 L201.2 U200.123(VDDPLL)
N24779418: C219.1 R233.1 U200.140(VBG)
N24780370: D302.2 J302.2(P2) U200.136(HSDM)
N24787483: C302.2(E2) J301.1 U200.141(PB8)
N24789501: D302.3 J302.3(P3) U200.137(HSDP)
N24791168: D301.1(A) R303.1
N24791706: R300.1 SW300.3(T3) SW300.4(T4) TP300.1(PIN1)
N24801620: R110.1 SW100.3(T3) SW100.4(T4) TP100.1(PIN1)
N24807577: J400.5 R222.2
N24807666: J400.18 R223.1
N24808378: J401.9 R203.2
N24808387: J401.13 R201.2
N24808410: J401.14 R202.1
N24808724: J402.15 R204.2 R224.2 R225.2 R226.2
N24809061: J402.8 R209.1
N24809079: J402.16 R228.1 R235.1
N24809084: J402.18 R229.1 R230.1
N24811387: J406.7 R400.1
N24811396: J406.9 R401.1
N24811405: J406.13 R403.1
N24811414: J406.15 R402.1
N24812303: J502.1 R215.2
N24812348: J502.6 R214.2
N24812360: J502.7 R216.2
N24812373: J502.8 R236.2
N24812579: J504.1 R219.2
N24812583: J504.2 R220.2
N24812588: J504.3 R221.2
N24813668: J500.4 R210.1 R212.1
N24813864: J505.8 R207.1
N24813868: J505.7 R208.1
N24813872: J505.6 R234.1
N24815184: J507.5 R213.1
N24815198: J507.4 R211.2
N24820806: TP200.1(PIN1) U200.85(TST)
N24820809: TP201.1(PIN1) U200.104(JTAGSEL)
N24828217: D902.3 J900.2(P2) R916.2 U900.A9(DMHS)
N24828220: D902.2 J900.3(P3) R917.2 U900.A8(DPHS)
N24828258: R916.1 U900.B9(DMFS)
N24828281: R917.1 U900.B8(DPFS)
N24828413: C902.1 R918.1 U900.C7(USB_VBIAS)
N24829572: C905.1(E1) C906.1 U900.E10(VDDCORE)
N24830093: C904.1 L901.1 U900.J6(VDDANA)
N24831736: R900.2 U900.K6(PC1)
N24831754: R921.2 U900.A3(PB4)
N24831761: R904.2 U900.D6(PB7)
N24831768: R905.2 U900.C5(PB9)
N24838587: R915.2 U900.K2(PX27)
N24847456: R911.1 U900.F8(PA8)
N24847465: R912.1 U900.D8(PA9)
N24847468: R913.1 U900.C10(PA10)
N24847477: R914.1 U900.C9(PA11)
N24847683: R910.1 U900.E9(PA4)
N24852982: R238.1 U700.16(REF_CLK)
N24853096: J700.13(L3) R701.2
N24853098: J700.1(TD+_R1) U700.6(TXP)
N24853102: J700.7(RD+_R7) U700.4(RXP)
N24853155: J700.4(NC_4) J700.5(NC_5)
N24853305: C706.1 J700.6(RCT_R6)
N24853405: C92.1 R704.1 U700.9(REXT)
N24853479: J700.8(RD-_R8) U700.3(RXM)
N24853544: J700.2(TD-_R2) U700.5(TXM)
N24853690: C705.1 J700.3(TCT_R3)
N24862847: R602.1 U600.1(A0)
N24862852: R601.1 U600.2(A1)
N24862857: R600.1 U600.3(A2)
N24863852: J600.1(DAT3) J901.1 R607.2
N24863909: J600.11(W/P) R612.1 TP600.1(PIN1)
N24898899: Q109.4(D2) Q109.6(D2)
N24898902: Q109.1(G2) Q109.3(G2) Q110.4(D2) Q110.6(D2) R613.1
N24905852: J501.8 R623.2
N24906501: J503.4 R217.1 R218.1
N24906994: TP908.1(PIN1) U900.K4(PX15/PX32)
N24906997: TP909.1(PIN1) U900.F1(PX19/PX59)
N24977746: J402.17 R205.2 R227.2
N24979820: J501.1 TP910.1(PIN1)
N25012935: R123.1 U901.M1(A11)
N25012941: R121.1 U901.N7(A10)
N25012944: R120.1 U901.M2(A9)
N25012953: R119.1 U901.N1(A8)
N25012956: R118.1 U901.N2(A7)
N25012965: R117.1 U901.P1(A6)
N25012968: R116.1 U901.P2(A5)
N25012977: R115.1 U901.R2(A4)
N25012980: R114.1 U901.R6(A3)
N25012989: R113.1 U901.P6(A2)
N25012992: R112.1 U901.P7(A1)
N25012998: R111.1 U901.N6(A0)
N25013332: R125.2 U901.A6(DQ0)
N25013338: R126.2 U901.B7(DQ1)
N25013344: R127.2 U901.C7(DQ2)
N25013354: R128.2 U901.D7(DQ3)
N25013360: R129.2 U901.D6(DQ4)
N25013366: R130.2 U901.E7(DQ5)
N25013372: R131.2 U901.F7(DQ6)
N25013378: R132.2 U901.G7(DQ7)
N25013384: R133.2 U901.G1(DQ8)
N25013390: R134.2 U901.F1(DQ9)
N25013396: R135.2 U901.E1(DQ10)
N25013402: R136.2 U901.D2(DQ11)
N25013408: R137.2 U901.D1(DQ12)
N25013414: R138.2 U901.C1(DQ13)
N25013420: R139.2 U901.B1(DQ14)
N25013426: R140.2 U901.A2(DQ15)
N247706016: R206.2 U200.60(PD22)
N2491361728: R124.1 U901.K2(CLK)

Pads without a net: J101 1; J302 4; J403 8 11 13; J406 3 5 11 17 19; J507 10 13 15 18 23 32; J900 4; NOREF#4 1; NOREF#5 1; NOREF#6 1; NOREF#7 1; NOREF#8 1; NOREF#9 1; U601 4 6 7; U900 A2 A4 A7 B1 B3 B7 C1 C2 C4 C6 D1 D2 D3 D4 D5 D7 E1 E3 E4 E7 E8 F3 F4 G1 G2 G3 G4 G6 G8 G9 G10 H1 H4 H5 H6 H10 J1 J2 J3 J7 J10 K1 K5 K7; U901 G2 G6 H1 H2 H7 J1 K1 L2 L6 M6 M7

## Via types
v1: diameter 0.457, hole 0.254, TOP to BOTTOM, 673 vias
v2: diameter 0.61, hole 0.305, TOP to BOTTOM, 73 vias
v3: diameter 0.406, hole 0.203, TOP to BOTTOM, 34 vias

## Routing (per net, layer and track width the routed paths; a pad name or vN(x,y) marks a point on that pad's centre or on a via; arc(x,y) is an arc through that point)
GND_POWER: length 410.2
  TOP w0.305: C911.2 66.54,127.49 v1(66.53,127.49) ; C900.2 61.07,126.99 61.09,126.97 ; C900.2 60.37,127.59 v1(60.17,127.79) ; C900.2 59.72,126.99 ; v3(71.49,123.66) 71.41,123.57 C904.2 ; v1(26.74,66.84) 26.74,66.73 U901.E2 ; C301.1 27.3,84.89 28.07,85.67 ; U200.44 35.21,78.41 34.96,78.16 v1(34.45,78.16) ; C914.2 71.38,124.26 v3(70.8,123.68) ; U200.8 30.94,95.27 v1(30.94,95.27) ; U200.95 52.07,92.27 52.36,92.57 52.36,92.71 52.36,92.71 v1(52.36,93.17) ; v1(24.79,66.84) 24.79,66.73 U901.B2 ; U200.135 36.21,101.64 36.46,101.89 v1(36.72,101.89) ; v1(23.95,66.09) 24.28,65.75 U901.A1 ; U901.C6 25.76,68.97 25.44,68.65 v1(25.44,68.56) ; C901.2 61.12,124.1 61.12,124.11 ; C901.2 60.33,123.39 60.32,123.37 ; C901.2 59.39,124.1 ; U901.R1 33.56,65.61 v1(33.26,65.3) ; v1(67.32,118.91) 67.32,118.91 C909.2 ; v1(34.62,101.91) 34.71,101.82 U200.138 ; U901.F6 27.71,68.97 27.39,68.65 v1(27.39,68.56) ; U200.115 46.21,101.93 v1(46.21,101.93) ; C913.2 64.86,125.18 v3(65.26,125.58) 65.66,125.18 C915.2 66.16,125.18 v3(66.56,125.58) 66.96,125.18 C912.2 67.46,125.18 v3(67.86,125.58) ; v1(25.37,45.11) 25.58,45.33 U600.4 ; U200.61 43.71,78.16 v1(43.71,78.16) ; C910.2 67.33,120.53 v3(67.66,120.2) ; U700.22 v1(29.05,125.85)
  TOP w0.381: 23.47,84.4 23.27,84.6 v1(23.27,87.05) 23.27,87.78 23.63,88.13 v1(24.39,88.13) v1(27.09,88.13) 27.73,88.13 28.07,87.79 v1(28.07,86.36) 28.07,85.67 ; 23.47,84.4 23.47,84.47 C300.1 24.2,83.61 24.93,82.88 v1(25.36,82.88) 25.36,82.88 26.54,81.71 v1(26.54,81.63) 26.61,81.63 27.5,80.74 v1(29.52,80.74) ; 23.47,84.4 v1(23.48,84.39) ; v1(36.02,121.98) 36.02,121.98 C711.2 ; C302.1 32.69,103.06 v1(33.25,102.5) ; 59.39,124.1 v1(59.39,124.1) ; v1(26.15,100.35) 26.16,100.36 R233.2 ; v1(28.81,115.14) 28.76,115.09 XC700.4 ; v1(28.81,115.14) v1(28.81,117.73) ; v1(28.81,115.14) 28.81,114.29 28.48,113.95 v1(26.53,113.95) 24.6,113.95 24.29,114.26 v1(24.29,114.92) v1(24.29,116.93) ; v1(28.81,117.73) 29.07,117.73 C92.2 ; v1(28.81,117.73) 28.03,118.5 C704.2 28.03,119.2 v1(28.75,119.91) ; v1(31.1,116.37) 31.09,116.38 R704.2 ; v1(28.93,104.5) 29.3,104.5 C303.2 29.67,103.39 v1(29.66,103.37) ; v1(24.29,116.93) 24.27,116.95 24.27,117.67 C709.2 25.11,118.61 v1(25.71,119.21) ; v1(24.29,116.93) 24.33,116.89 XC700.2 ; C600.2 v1(32.67,46.99) ; v1(24.73,127.46) 24.73,127.46 C708.2 ; 59.72,126.99 v1(59.72,126.99) ; v1(26.24,129.28) 26.24,129.27 C713.2 ; C219.2 26.15,99.28 v1(26.14,99.26) ; R67.2 34.53,116.81 v1(34.42,116.7) ; R70.2 37.95,122.49 37.95,122.32 v1(37.96,122.31) ; R603.1 v1(32.68,45.93) ; v1(28.47,82.7) 27.22,82.7 26.74,83.18 v1(26.74,84.28) 27.23,84.77 C301.1 ; v1(26.47,127.12) 26.14,126.79 C710.2 ; R69.2 v1(35.58,116.63) ; v1(71.44,120.29) 71.44,120.28 R616.1
  TOP w0.406: J900.5 68.15,131.28 v2(68.15,131.28) ; J302.5 5.24,105.98 v2(5.25,105.99)
  TOP w0.508: v1(50.88,123.65) 50.88,123.65 R614.2 ; v1(68.2,128.54) 68.2,128.99 D902.1 ; v1(67.58,34.96) SW100.1 68.65,36.78 v1(68.65,36.78) ; v2(23.6,126.2) 23.48,126.08 C701.2 ; v2(4.08,78.86) 4.08,78.86 J400.17 ; J400.13 4.08,83.94 v2(4.08,83.94) ; v1(76.06,36.74) 76.06,36.73 SW300.1 76.06,33.1 v1(76.06,33.1) ; v1(59.37,104.41) 59.36,104.41 C216.2 58.4,105.51 v1(58.4,105.52) ; v1(48.6,119.98) 48.42,119.8 C714.2 48.82,118.88 49.39,119.45 v1(49.39,119.47) ; v2(9.47,61.16) 9.48,61.18 J400.30 ; v1(36.76,121.65) 36.48,121.37 C220.2 ; v1(77.2,42.92) 76.95,43.17 SW300.2 v1(76.06,45.24) ; v1(68.65,45.18) SW100.2 68.6,43.17 67.78,43.17 v1(67.43,42.83) ; J400.15 4.08,81.4 v2(4.08,81.4) ; v2(4.08,86.48) 4.08,86.48 J400.11 ; J400.9 4.08,89.02 v2(4.08,89.02) ; v1(58.29,129) 58.31,128.99 XC900.4 59.17,127.54 v1(59.72,126.99) ; v2(26.59,124.86) 26.57,124.84 C700.2 25.78,124.84 C702.2 ; D302.1 8.71,109.9 v1(8.71,109.9) ; R613.2 v1(42.53,118.11) ; J400.2 11.6,98.01 v2(11.61,98.01) ; J400.4 11.6,95.47 v2(11.61,95.47)
  LYR2_GND w0.508: 2.38,38.76 J406.6 ; J406.6 2.38,40.37 ; J406.6 4,38.76 ; J406.6 4,40.37 ; J402.2 79.88,73.04 ; J402.2 79.88,71.42 ; J402.2 78.26,73.04 ; J402.2 78.26,71.42 ; J406.16 4,53.07 ; J406.16 2.38,53.07 ; J406.16 4,51.46 ; J406.16 2.38,51.46 ; 78.26,108.6 J401.2 ; J401.2 78.26,106.98 ; J401.2 79.88,106.98 ; J401.2 79.88,108.6 ; 2.38,54 J406.18 ; J406.18 4,55.61 ; J406.18 2.38,55.61 ; J406.18 4,54 ; J506.6 39.24,64.69 ; J506.6 37.62,66.31 ; J506.6 39.24,66.31 ; J506.6 37.62,64.69 ; J302.S1 5.42,110.31 ; J302.S1 3.48,108.71 ; J302.S1 3.48,110.31 ; 14.76,87.68 J501.7 ; J501.7 16.38,89.3 ; J501.7 14.76,89.3 ; J501.7 16.38,87.68 ; J700.12 4.81,121.95 ; J700.12 4.81,120.46 ; J700.12 3.32,121.95 ; J700.12 3.32,120.46 ; 2.67,103.92 J302.S4 2.67,102.3 ; 2.38,43.84 J406.10 ; J406.10 2.38,45.45 ; J406.10 4,45.45 ; J406.10 4,43.84 ; 66.42,131.1 J900.S2 ; J900.S2 66.42,133.03 ; J900.S2 68.02,131.1 ; J900.S2 68.02,133.03 ; 2.67,112.27 J302.S3 2.67,110.65 ; 2.38,50.53 J406.14 ; J406.14 4,48.92 ; J406.14 2.38,48.92 ; J406.14 4,50.53 ; J900.S1 72.47,133.03 ; J900.S1 70.87,133.03 ; J900.S1 72.47,131.1 ; 2.38,46.38 J406.12 ; J406.12 4,47.99 ; J406.12 4,46.38 ; J406.12 2.38,47.99 ; 75.72,50.18 J402.19 ; J402.19 77.34,50.18 ; J402.19 77.34,48.56 ; J402.19 75.72,48.56 ; J406.20 4,56.54 ; J406.20 4,58.15 ; J406.20 2.38,56.54 ; J406.20 2.38,58.15 ; 14.76,91.84 J501.6 14.76,90.22 ; 2.38,41.3 J406.8 ; J406.8 2.38,42.91 ; J406.8 4,41.3 ; J406.8 4,42.91 ; 2.38,36.22 J406.4 ; J406.4 2.38,37.83 ; J406.4 4,36.22 ; J406.4 4,37.83 ; 78.26,122.22 J101.2 ; J101.2 78.26,123.84 ; J101.2 79.88,122.22 ; J101.2 79.88,123.84 ; J507.36 21.46,34.34 ; J507.36 19.84,35.96 ; J507.36 21.46,35.96 ; J507.36 19.84,34.34 ; 19.84,38.5 J507.35 ; J507.35 21.46,36.88 ; J507.35 21.46,38.5 ; J507.35 19.84,36.88 ; 75.72,85.74 J401.19 ; J401.19 77.34,85.74 ; J401.19 75.72,84.12 ; J401.19 77.34,84.12 ; 72.81,133.85 J900.S3 74.43,133.85 ; J302.S2 5.42,105.86 ; J302.S2 3.48,105.86 ; J302.S2 3.48,104.26 ; J302.S2 5.42,104.26 ; J500.7 64.64,104.45 ; J500.7 63.02,104.45 ; J500.7 63.02,106.07 ; J500.7 64.64,106.07 ; 66.08,133.85 J900.S4 64.46,133.85
  BOTTOM w0.254: v3(64.61,120.3) 64.94,120.63 U900.B10 ; U900.E6 v3(66.56,123.63) ; U900.F10 67.54,120.32 v3(67.66,120.2) ; U900.F5 v3(67.86,124.28)
  BOTTOM w0.305: U900.H3 v3(68.51,125.58) ; U900.H8 v3(69.16,121.68) ; v1(34.62,101.91) 34.21,101.5 C217.2 ; U900.E2 v3(66.56,125.58) ; U900.C8 v3(65.26,121.68) ; v1(52.36,93.17) 52.25,93.28 C204.2 ; U900.C3 v3(65.26,125.58) ; v1(36.72,101.89) 36.74,101.87 C200.2
  BOTTOM w0.381: v1(34.45,78.16) 34.68,78.39 C206.2 ; v1(25.44,68.56) 25.58,68.43 C908.2 ; C212.2 51.86,85.2 v1(52.29,84.77) 51.71,84.19 C203.2 ; v1(68.42,116.67) 68.41,116.67 C905.2 ; C213.2 38.2,78.48 v1(38.46,78.21) ; C207.2 49.19,78.2 v1(49.19,78.2) ; v1(31.14,71.24) 31,71.24 C917.2 ; v1(33.76,71.93) 34.15,71.54 C916.2 ; C202.2 28.77,96.74 v1(28.42,96.39) ; C918.2 25.72,70.34 v1(25.54,70.16) ; v1(28.01,67) 28.19,66.82 C919.2 ; v1(80.83,116.31) 80.83,116.31 TP900.1 ; C201.2 31.25,101.02 v1(31.08,101.19) ; C215.2 42.33,103.05 v1(41.78,103.6) 42.33,104.15 C208.2 ; v1(60.83,121.98) 60.82,121.99 C902.2 ; C922.2 26.53,66.63 v1(26.74,66.84) ; C906.2 67.41,116.67 v1(67.41,116.67) ; C209.2 28.64,84.91 v1(28.55,84.82) ; v1(42.05,101.87) 42.07,101.87 42.07,101.87 C214.2 ; v1(60.61,119.88) 60.62,119.87 R918.2 ; C210.2 28.66,82.89 v1(28.47,82.7) ; C211.2 51.61,99.4 v1(51.61,99.41) ; C920.2 24.58,66.63 v1(24.79,66.84) ; C218.1 31.42,95.74 v1(30.94,95.27) ; v1(27.39,68.56) 27.58,68.37 C921.2 ; C205.2 28.87,83.9 v1(28.54,84.23) ; C104.2 49.9,87.21 v1(49.88,87.2)
  BOTTOM w0.508: 2.38,40.37 J406.6 ; J406.6 4,38.76 ; J406.6 2.38,38.76 ; J406.6 4,40.37 ; C613.2 43.2,115.06 v1(43.2,115.05) ; 68.02,133.03 J900.S2 66.42,133.03 ; 2.38,42.91 J406.8 ; J406.8 2.38,41.3 ; J406.8 4,41.3 ; J406.8 4,42.91 ; 3.48,105.86 J302.S2 ; J302.S2 5.42,105.86 ; J302.S2 3.48,104.26 ; J302.S2 5.42,104.26 ; v1(32.03,120.61) 31.48,120.06 J600.12 ; 70.87,133.03 J900.S1 ; J900.S1 72.47,131.1 ; J900.S1 72.47,133.03 ; 78.26,106.98 J401.2 ; J401.2 79.88,106.98 ; J401.2 79.88,108.6 ; J401.2 78.26,108.6 ; J406.16 4,53.07 ; J406.16 4,51.46 ; J406.16 2.38,53.07 ; J406.16 2.38,51.46 ; 21.46,34.34 J507.36 19.84,34.34 ; J403.9 29.7,56.46 v2(29.7,56.47) ; 2.38,43.84 J406.10 ; J406.10 4,43.84 ; J406.10 4,45.45 ; J406.10 2.38,45.45 ; 2.38,47.99 J406.12 ; J406.12 4,47.99 ; J406.12 4,46.38 ; J406.12 2.38,46.38 ; v1(57.3,120.31) 56.25,120.31 J600.13 ; 63.02,104.45 J500.7 ; J500.7 64.64,104.45 ; J500.7 63.02,106.07 ; J500.7 64.64,106.07 ; v2(33.51,56.47) 33.51,56.46 J403.15 ; J600.14 30.9,132.56 v1(30.91,132.55) ; J600.14 32.28,134.56 v1(32.29,134.57) ; J600.14 29.53,134.56 v1(29.51,134.58) ; 78.26,122.22 J101.2 ; J101.2 79.88,122.22 ; J101.2 79.88,123.84 ; J101.2 78.26,123.84 ; 2.38,50.53 J406.14 ; J406.14 4,50.53 ; J406.14 4,48.92 ; J406.14 2.38,48.92 ; v1(56.81,134.58) 56.83,134.56 J600.15 ; v1(58.21,132.55) 58.2,132.56 J600.15 ; 2.38,54 J406.18 ; J406.18 2.38,55.61 ; J406.18 4,55.61 ; J406.18 4,54 ; J600.12 28.9,120.06 v1(28.75,119.91) ; J600.12 30.9,121.28 v1(30.24,121.95) ; 56,118.4 J600.13 ; J600.13 54.97,120.06 ; J600.13 57.03,120.06 ; J600.13 55.48,119.54 v1(54.16,119.54) ; 2.38,36.22 J406.4 ; J406.4 4,37.83 ; J406.4 2.38,37.83 ; J406.4 4,36.22 ; J406.20 4,56.54 ; J406.20 2.38,56.54 ; J406.20 4,58.15 ; J406.20 2.38,58.15 ; v2(34.6,56.53) 34.78,56.36 J403.17 ; 2.67,110.65 J302.S3 2.67,112.27 ; v1(38.3,116.63) 38.3,116.83 38.93,117.46 J600.6 ; TP900.1 81.48,115.46 ; TP900.1 80.83,114.81 ; TP900.1 80.18,115.46 ; 3.32,121.95 J700.12 ; J700.12 3.32,120.46 ; J700.12 4.81,120.46 ; J700.12 4.81,121.95 ; 74.43,133.85 J900.S3 72.81,133.85 ; J600.15 59.58,134.56 v1(59.59,134.57) ; v2(27.16,56.47) 27.16,56.46 J403.5 ; v2(36.31,56.62) 36.05,56.36 J403.19 ; 3.48,108.71 J302.S1 ; J302.S1 3.48,110.31 ; J302.S1 5.42,110.31 ; 2.67,103.92 J302.S4 2.67,102.3 ; v2(25.89,56.47) 25.89,56.46 J403.3 ; v1(45.39,119.17) 45.6,119.17 46.42,118.35 J600.3 ; 66.08,133.85 J900.S4 64.46,133.85
  BOTTOM w0.762: C612.2 45.47,113.15 v2(45.47,113.14)
  vias: v1(0.74,98.42) v1(0.78,135.71) v1(0.78,92.77) v1(0.76,86.36) v1(0.79,78.98) v1(0.77,72.18) v1(0.84,63.62) v1(0.78,54.49) v1(0.82,44.06) v1(0.84,32.34) v1(0.89,113.86) v1(1.02,129.32) v1(0.96,121.54) v1(4.36,68.8) v1(6.25,135.71) v1(7.43,112.66) v1(8.86,104.62) v1(9.01,32.33) v1(9.11,38.38) v1(9.23,58.54) v1(9.39,47.03) v1(9.65,43.24) v1(9.9,116.78) v1(10.21,50.59) v1(10.57,128.7) v1(10.73,121.69) v1(11,99.64) v1(12.58,135.73) v1(13.15,53.2) v1(13.65,113.78) v1(13.92,100.65) v1(14.2,50.91) v1(14.22,45.93) v1(14.17,43.4) v1(14.29,48.61) v1(15.02,38.62) v1(15.69,32.33) v1(15.93,109.59) v1(17.19,100.6) v1(18.01,107.87) v1(19.36,135.69) v1(20.45,113.94) v1(21.98,131.78) v1(22.75,114.19) v1(22.75,114.88) v1(23.01,32.39) v1(23.51,114.86) v1(23.51,114.19) v1(24.97,101.65) v1(25.59,117.87) v1(25.65,87.35) v1(25.74,108.8) v1(25.66,86.02) v1(27.4,120.72) v1(27.36,33.85) v1(27.5,105.25) v1(27.57,117.88) v1(27.7,109.2) v1(27.7,107.49) v1(28.37,123.85) v1(28.37,121.95) v1(29.3,122.9) v1(29.57,135.71) v1(30.23,123.84) v1(30.99,109.28) v1(31.02,106.99) v1(30.99,102.02) v1(31.06,114.89) v1(31.79,128.32) v1(32.75,32.49) v1(34.11,103.95) v1(34.27,109.2) v1(34.35,106.83) v1(36.88,124.65) v1(37.08,135.66) v1(39.36,32.41) v1(41.83,124.71) v1(43.21,128.96) v1(45.17,135.68) v1(46.22,32.39) v1(53.03,135.71) v1(53.01,116.77) v1(52.96,115.46) v1(53,114.31) v1(53.36,122.68) v1(53.48,119.51) v1(53.8,32.41) v1(54.41,116.76) v1(54.42,115.51) v1(54.47,114.32) v1(54.83,126.1) v1(54.86,128.52) v1(54.91,124.72) v1(54.94,123.25) v1(55.85,116.81) v1(55.83,115.52) v1(55.8,114.38) v1(56.46,129.16) v1(56.81,125.43) v1(57.13,122.63) v1(58.72,125.34) v1(59.28,122.22) v1(59.94,32.41) v1(61.69,135.62) v1(62.75,123.4) v1(62.87,125.21) v1(65.42,39.06) v1(65.63,41.56) v1(65.57,32.35) v1(66.41,111.63) v1(71.44,103.79) v1(71.52,114.73) v1(71.99,41.68) v1(73.66,129.35) v1(74.21,124.78) v1(76.57,118.12) v1(76.75,135.64) v1(79.17,112) v1(80.23,91.28) v1(80.3,80.88) v1(80.38,99.09) v1(80.38,45.34) v1(80.64,58.85) v1(81.68,71.64) v1(81.73,65.96) v1(82.62,135.7) v1(82.59,129.42) v1(82.63,103.9) v1(82.63,97.29) v1(82.64,91.76) v1(82.63,32.45) v1(82.65,120.39) v1(82.68,111.86) v1(82.66,84.3) v1(82.67,76.11) v1(82.66,68.83) v1(82.7,63.69) v1(82.7,56.32) v1(82.68,49.52) v1(82.66,38.12) v2(57.36,116.18) v2(57.44,114.38) v2(58.39,115.28) v2(59.62,115.51) v2(59.66,114.38) v2(60.35,116.33)
